# Altium PCB 2.0_LCD_FPC左移1.5mm.PcbDoc
Units mm, origin at the board's own origin, x right, y up, seen from the top; angles counter-clockwise.
Board outline 55.63 x 38 mm, 2 copper layers (Top Layer, Bottom Layer); 15 components, 23 nets, 85 pads, 92 vias.
Unrouted connection lines stored in the file: 19.
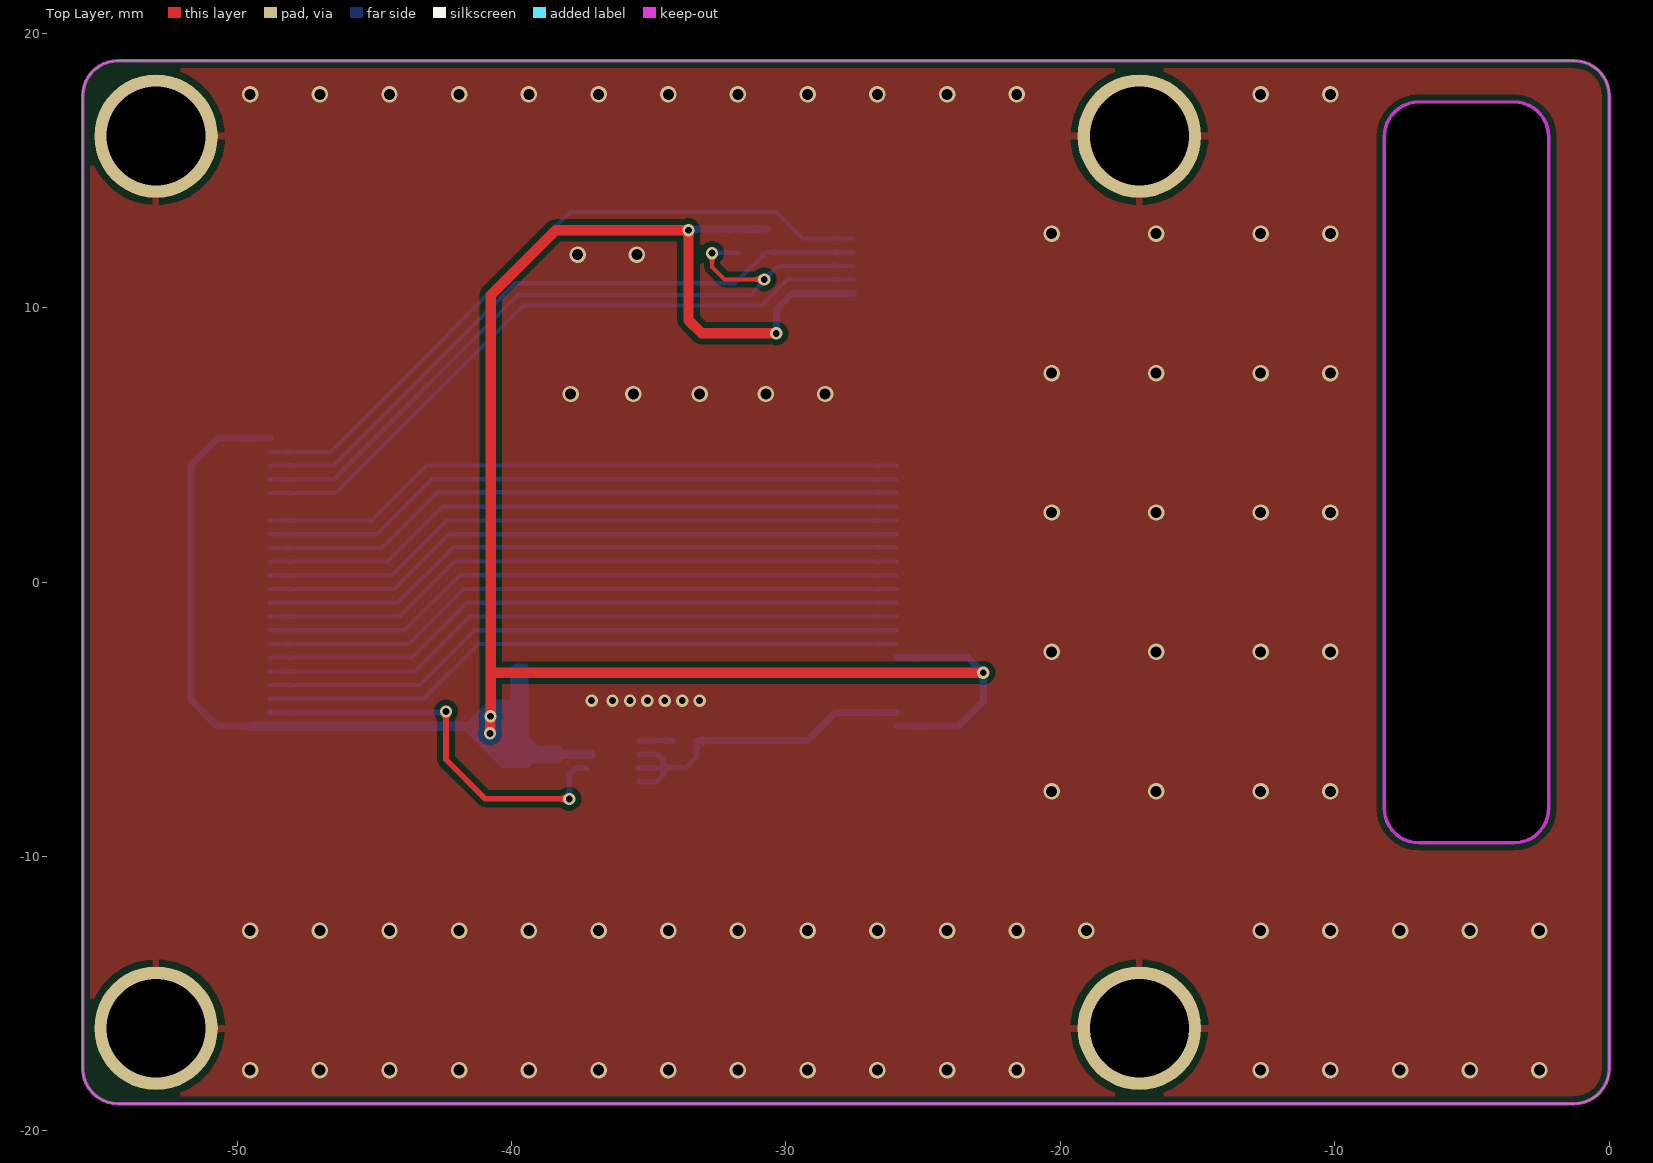
[diagram p0: Top Layer view]
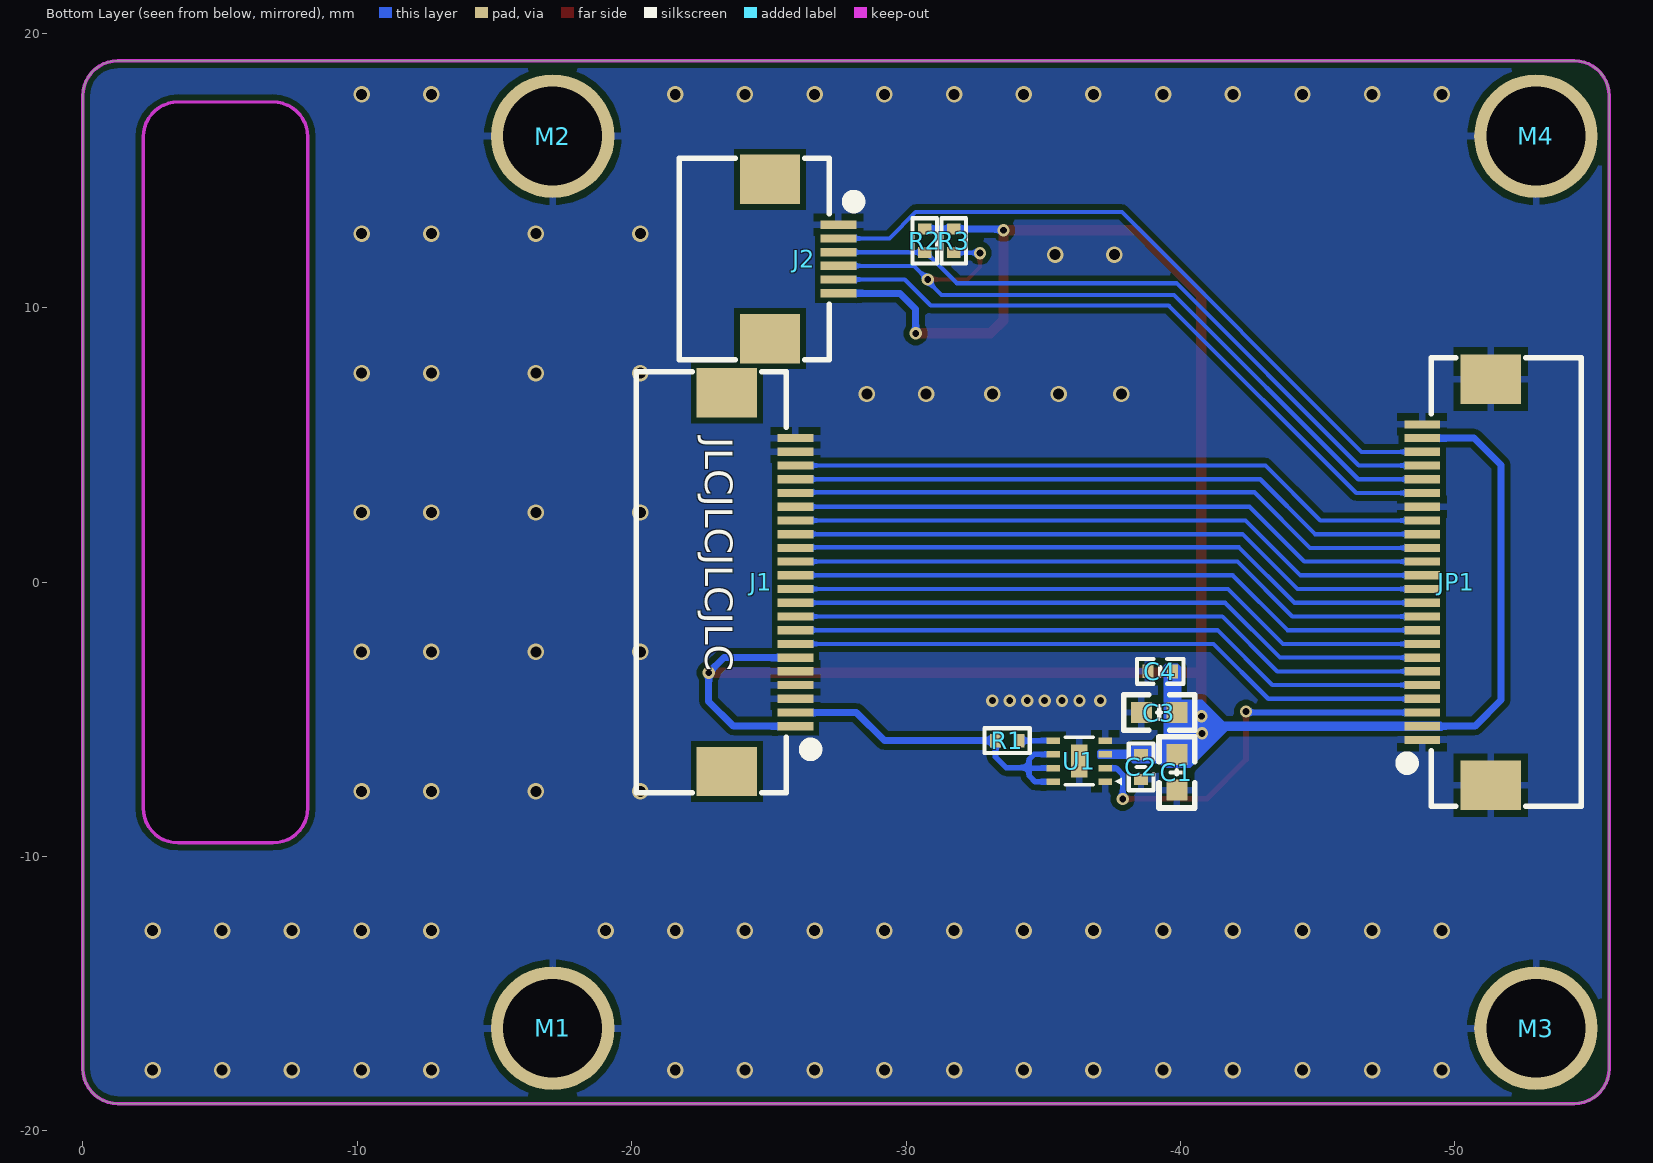
[diagram p1: Bottom Layer view, seen from below]
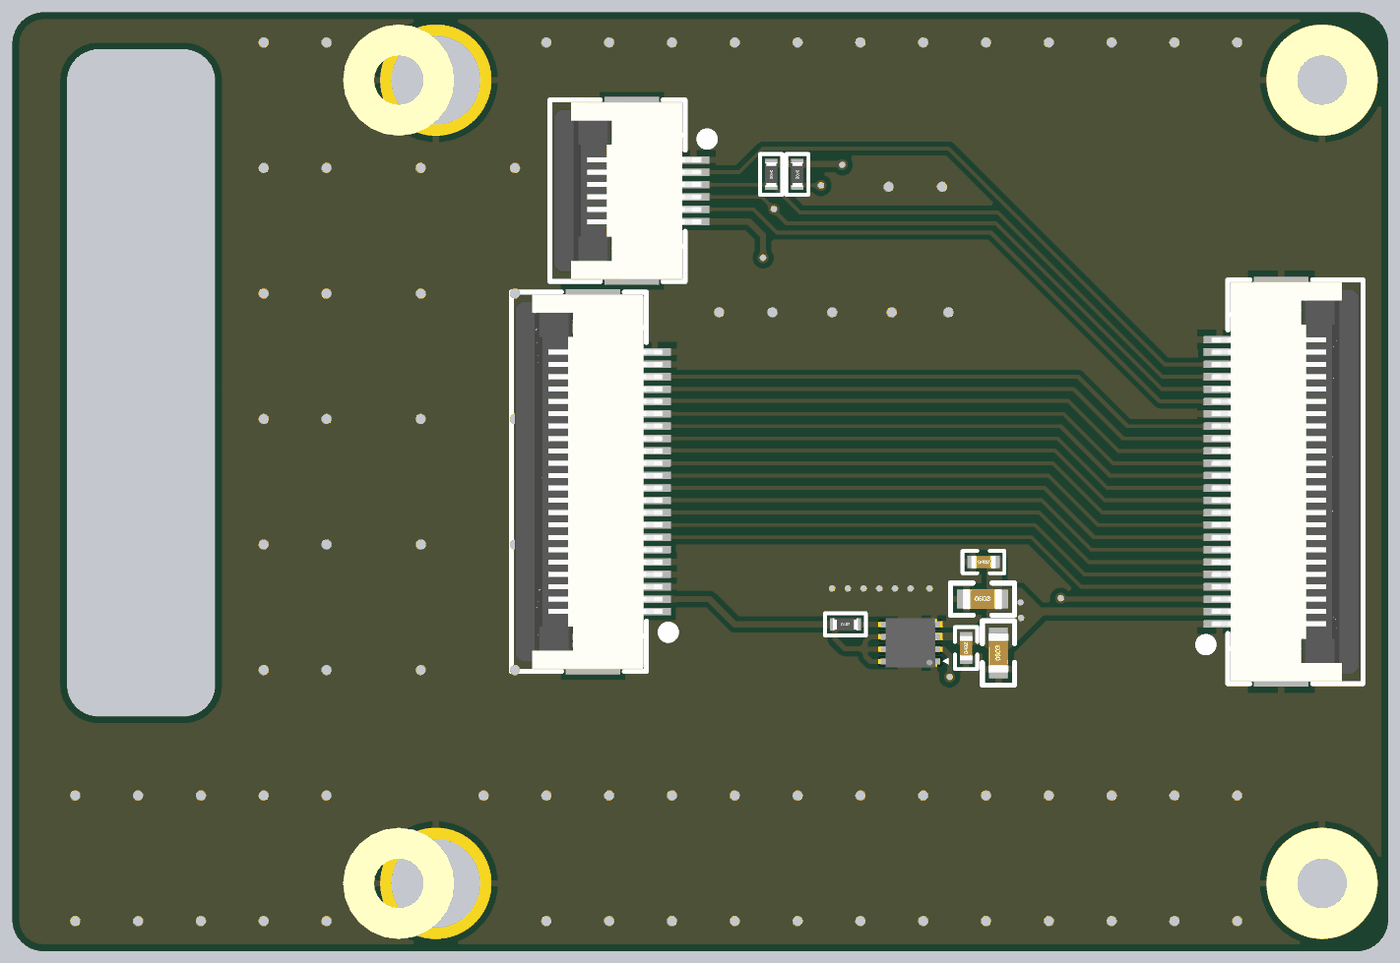
[diagram p2: 3D render of the assembled board from below, using the file's embedded part models]

## Layer stack, top to bottom
Top Solder: solder mask 0.0102, Solder Resist, Dk 3.5
Top Layer: signal copper 0.0356
Dielectric 1: dielectric 0.32, FR-4, Dk 4.8
Bottom Layer: signal copper 0.0356
Bottom Solder: solder mask 0.0102, Solder Resist, Dk 3.5

## Board outline
-55.626,-17.73 -55.626,17.73 cw(c-54.356,17.73) -54.356,19 -1.27,19 cw(c-1.27,17.73) 0,17.73 0,-17.73 cw(c-1.27,-17.73) -1.27,-19 -54.356,-19 cw(c-54.356,-17.73)
cut-out: -8.2,-8.23 ccw(c-6.93,-8.23) -6.93,-9.5 -3.47,-9.5 ccw(c-3.47,-8.23) -2.2,-8.23 -2.2,16.23 ccw(c-3.47,16.23) -3.47,17.5 -6.93,17.5 ccw(c-6.93,16.23) -8.2,16.23

## Design rules (kind name [scope] priority, off if disabled: settings)
Clearance Clearance_1 [InPolygon] p1: gap=0.203 ignorepadtopadclearanceinfootprint=TRUE
Clearance [All] p2: gap=0.152 ignorepadtopadclearanceinfootprint=FALSE
HoleSize [All] p1: absolutevalues=TRUE maxlimit=12.7 minlimit=0.025 maxpercent=80.000 minpercent=20.000
MinimumSolderMaskSliver [All] p1: minsoldermaskwidth=0
PolygonConnect [All] p1: thpad.connectstyle=Relief thpad.reliefconductorwidth=0.254 thpad.reliefentries=4 thpad.polygonreliefangle="90 Angle" thpad.airgapwidth=0.254 smdpad.connectstyle=Relief smdpad.reliefconductorwidth=0.254 smdpad.reliefentries=4 smdpad.polygonreliefangle="90 Angle" smdpad.airgapwidth=0.254 via.connectstyle=Direct via.reliefconductorwidth=0.254 via.reliefentries=4 via.polygonreliefangle="90 Angle" via.airgapwidth=0.254
RoutingVias [All] p1: holewidth=0.25 width=0.45 viastyle="Through Hole" minholewidth=0.25 minwidth=0.45 maxholewidth=0.6 maxwidth=0.8
SilkToSilkClearance [All] p1: silktosilkclearance=0
SilkToSolderMaskClearance [IsPad] p1: minsilkscreentomaskgap=0 clearancetoexposedcopper=TRUE
SolderMaskExpansion [IsVia] p1: expansion=0.102 istentingtop=TRUE useseparateexpansions=TRUE expansionbottom=0.102 istentingbottom=TRUE
Width [All] p1: maxlimit=0.508 minlimit=0.152 preferedwidth=0.152
26 further rules are at their usual default settings.

## Components (designator, comment, footprint, x,y, rotation, side; value= is the part's Value field where it differs from the comment)
C1 "4.7uF" C0603_L -39.869,-6.931 r90 bottom
C2 "0.1uF" C0402_L -38.565,-6.734 r90 bottom
C3 "4.7uF" C0603_L -39.228,-4.75 r180 bottom
C4 "0.1uF" C0402_L -39.268,-3.251 r180 bottom
J1 "0.5mmFPC" FPC0.5-WT-22P -23.473,0 r90 bottom locked
J2 "Touch" FPC0.5-WT-6P -25.041,11.778 r270 bottom locked
JP1 "24Pin" FPC0.5-WT-24P -51.308,0 r90 bottom locked
M1 "M2" M2*4.5*2.5*0.8*3.3#1 -15.621,-16.256 r0 bottom
M2 "M2" M2*4.5*2.5*0.8*3.3#1 -15.621,16.256 r0 bottom locked
M3 "M2" M2*4.5*2.5*0.8*3.3#2 -52.959,-16.256 r0 bottom locked
M4 "M2" M2*4.5*2.5*0.8*3.3#2 -52.959,16.256 r180 bottom
R1 "NC/0R" R0402_L -33.686,-5.774 r180 bottom
R2 "4.7K" R0402_L -30.683,12.439 r270 bottom
R3 "4.7K" R0402_L -31.741,12.439 r270 bottom
U1 "AW9364DNR" DFN2X2-8L -36.312,-6.524 r0 bottom

## Footprints (in the part's own frame and the unit in brackets; to place one, negate y for a bottom-side part, rotate by r counter-clockwise, add the part's x,y. Pads: shape width x height; smd on the part's side, far side on the other; paste and mask are expansions set on the pad)
C0402_L [mm] "无极性贴片电容"
  rect 0.4x0.5 smd: 1(-0.45,0) 2(0.45,0)
  silkscreen extent -0.85,-0.45 0.85,0.45, body extent -0.5,-0.26 0.5,0.26, height 0.54
C0603_L [mil] "无极性贴片电容"
  rect 30x30 smd: 1(-25.59,0) 2(25.59,0)
  silkscreen extent -51,-26 51,26, body extent -31,-16 32,16, height 33
DFN2X2-8L [mm]
  rect 0.5x0.24 smd mask+0.102: 1(-0.95,0.75) 2(-0.95,0.25) 3(-0.95,-0.25) 4(-0.95,-0.75) 5(0.95,-0.75) 6(0.95,-0.25) 7(0.95,0.25) 8(0.95,0.75)
  rect 0.6x1.2 smd mask+0.102: 9(0,0)
  silkscreen extent -1.55,-0.86 0.51,0.88, body extent -1,-1 1,1, height 0.75
FPC0.5-WT-6P [mm] "长：7.2mm，宽：5.2mm，高：2mm               黄晶宝石"
  rect 1.8x2.2 smd: 0(-2.9,0) 0(2.9,0)
  rect 0.3x1.3 smd: 1(-1.25,2.497) 2(-0.75,2.497) 3(-0.25,2.497) 4(0.25,2.497) 5(0.75,2.497) 6(1.25,2.497)
  silkscreen extent -3.67,-3.3 3.67,3.23, body extent -3.6,-3.15 3.6,2.85, height 2
FPC0.5-WT-22P [mm] "长：15.2mm，宽：5.2mm，高：2mm 淘宝ID:黄晶宝石   店铺网址:https://shop463601444.taobao.com"
  rect 1.8x2.2 smd: 0(-6.9,0) 0(6.9,0)
  rect 0.3x1.3 smd: 1(-5.25,-2.497) 2(-4.75,-2.497) 3(-4.25,-2.497) 4(-3.75,-2.497) 5(-3.25,-2.497) 6(-2.75,-2.497) 7(-2.25,-2.497) 8(-1.75,-2.497) 9(-1.25,-2.497) 10(-0.75,-2.497) 11(-0.25,-2.497) 12(0.25,-2.497) 13(0.75,-2.497) 14(1.25,-2.497) 15(1.75,-2.497) 16(2.25,-2.497) 17(2.75,-2.497) 18(3.25,-2.497) 19(3.75,-2.497) 20(4.25,-2.497) 21(4.75,-2.497) 22(5.25,-2.497)
  silkscreen extent -7.68,-3.23 7.68,3.3, body extent -7.6,-2.85 7.6,3.15, height 2
FPC0.5-WT-24P [mm] "长：16.2mm，宽：5.2mm，高：2mm 淘宝ID:黄晶宝石   店铺网址:https://shop463601444.taobao.com"
  rect 1.8x2.2 smd: 0(-7.4,0) 0(7.4,0)
  rect 0.3x1.3 smd: 1(-5.75,2.497) 2(-5.25,2.497) 3(-4.75,2.497) 4(-4.25,2.497) 5(-3.75,2.497) 6(-3.25,2.497) 7(-2.75,2.497) 8(-2.25,2.497) 9(-1.75,2.497) 10(-1.25,2.497) 11(-0.75,2.497) 12(-0.25,2.497) 13(0.25,2.497) 14(0.75,2.497) 15(1.25,2.497) 16(1.75,2.497) 17(2.25,2.497) 18(2.75,2.497) 19(3.25,2.497) 20(3.75,2.497) 21(4.25,2.497) 22(4.75,2.497) 23(5.25,2.497) 24(5.75,2.497)
  silkscreen extent -8.18,-3.3 8.18,3.23, body extent -8.1,-3.15 8.1,2.85, height 2
M2*4.5*2.5*0.8*3.3#1 [mm] "SMT螺母"
  round 4.5 hole 3.6: 1(-1.5,0)
  body extent -2.25,-2.25 2.25,2.25, height 2.5
M2*4.5*2.5*0.8*3.3#2 [mm] "SMT螺母"
  round 4.5 hole 3.6: 1(0,0)
  body extent -2.25,-2.25 2.25,2.25, height 2.5
R0402_L [mm] "1/16W贴片电阻"
  rect 0.4x0.5 smd: 1(-0.425,0) 2(0.425,0)
  silkscreen extent -0.82,-0.45 0.83,0.45, body extent -0.5,-0.25 0.5,0.25, height 0.3

## Part data
C1 C2 C3 C4: library part C, "贴片电容", BOM名称=无极性贴片电容, 联系卖家，免费查找封装=唯一出售店铺网址https://shop463601444.taobao.com
J1: library part 中景园2.0寸屏幕FPC接口
J2: library part 深圳市大显伟业2.0寸触摸屏
JP1: library part 屏幕板FPC, "屏幕板外接座"
M1 M2 M3 M4: library part M2系列, "M2孔支撑柱"
R1 R2 R3: library part R, "贴片电阻", BOM名称=贴片电阻, 联系卖家，免费查找封装=唯一出售店铺网址https://shop463601444.taobao.com
U1: "并联调光背光驱动"

## Via types
v1: diameter 0.6, hole 0.4, Top Layer to Bottom Layer, tented both sides, 76 vias
v2: diameter 0.45, hole 0.25, Top Layer to Bottom Layer, tented both sides, 16 vias

## Nets (pads, with @x,y where several pads share a name; then routed paths per layer and width w, separated by ;. In a path a pad name is that pad's centre, name@x,y a point inside that pad or via, vN(x,y) a via of type N, cw(c..) or ccw(c..) an arc to the next point about the centre after c; other vN are vias at no path point)
CS: J1.18 JP1.15 | length 23.7
  Bottom Layer w0.152: JP1.15 -44.724,1.25 -42.697,3.277 -25.997,3.277 J1.18
DB0: J1.14 JP1.11 | length 23.7
  Bottom Layer w0.152: JP1.11 -44.158,-0.75 -42.138,1.27 -25.99,1.27 J1.14
DB1: J1.13 JP1.10 | length 23.7
  Bottom Layer w0.152: JP1.10 -44.077,-1.25 -42.077,0.75 J1.13
DB2: J1.12 JP1.9 | length 23.7
  Bottom Layer w0.152: JP1.9 -43.907,-1.75 -41.907,0.25 J1.12
DB3: J1.11 JP1.8 | length 23.7
  Bottom Layer w0.152: JP1.8 -43.737,-2.25 -41.737,-0.25 J1.11
DB4: J1.10 JP1.7 | length 23.7
  Bottom Layer w0.152: JP1.7 -43.632,-2.75 -41.632,-0.75 J1.10
DB5: J1.9 JP1.6 | length 23.7
  Bottom Layer w0.152: JP1.6 -43.528,-3.25 -41.528,-1.25 J1.9
DB6: J1.8 JP1.5 | length 23.7
  Bottom Layer w0.152: JP1.5 -43.348,-3.75 -41.348,-1.75 J1.8
DB7: J1.7 JP1.4 | length 23.7
  Bottom Layer w0.152: JP1.4 -43.203,-4.25 -41.203,-2.25 J1.7
GND: C1.1 C2.1 C3.1 C4.1 J1.3 J1.4 J1.5 J1.21 J1.22 J2.1 JP1.0 JP1.1 JP1.18 JP1.24 M1.1 M2.1 M3.1 M4.1 U1.1 U1.4 U1.9
  other v1: -49.53,-17.78 -46.99,-17.78 -44.45,-17.78 -41.91,-17.78 -39.37,-17.78 -36.83,-17.78 -34.29,-17.78 -31.75,-17.78 -29.21,-17.78 -26.67,-17.78 -24.13,-17.78 -21.59,-17.78 -12.7,-17.78 -10.16,-17.78 -7.62,-17.78 -5.08,-17.78 -2.54,-17.78 -49.53,-12.7 -46.99,-12.7 -44.45,-12.7 -41.91,-12.7 -39.37,-12.7 -36.83,-12.7 -34.29,-12.7 -31.75,-12.7 -29.21,-12.7 -26.67,-12.7 -24.13,-12.7 -21.59,-12.7 -19.05,-12.7 -12.7,-12.7 -10.16,-12.7 -7.62,-12.7 -5.08,-12.7 -2.54,-12.7 -20.32,-7.62 -16.51,-7.62 -12.7,-7.62 -10.16,-7.62 -20.32,-2.54 -16.51,-2.54 -12.7,-2.54 -10.16,-2.54 -20.32,2.54 -16.51,2.54 -12.7,2.54 -10.16,2.54 -37.846,6.858 -35.56,6.858 -33.147,6.858 -30.734,6.858 -28.575,6.858 -20.32,7.62 -16.51,7.62 -12.7,7.62 -10.16,7.62 -37.592,11.938 -35.433,11.938 -20.32,12.7 -16.51,12.7 -12.7,12.7 -10.16,12.7 -49.53,17.78 -46.99,17.78 -44.45,17.78 -41.91,17.78 -39.37,17.78 -36.83,17.78 -34.29,17.78 -31.75,17.78 -29.21,17.78 -26.67,17.78 -24.13,17.78 -21.59,17.78 -12.7,17.78 -10.16,17.78
  other v2: -37.084,-4.318 -36.322,-4.318 -35.687,-4.318 -35.052,-4.318 -34.417,-4.318 -33.782,-4.318 -33.147,-4.318
LCD_BL: JP1.3 U1.2 | length 14.9
  Top Layer w0.203: v2(-42.391,-4.713) -42.391,-6.469 -40.961,-7.899 v2(-37.897,-7.899)
  Bottom Layer w0.203: JP1.3 -42.428,-4.75 v2(-42.391,-4.713) ; v2(-37.897,-7.899) -37.897,-7.01 -37.668,-6.782 -37.27,-6.782 U1.2
NetR1_2: R1.2 U1.5 | length 1.3
  Bottom Layer w0.203: U1.5 R1.2@-34.111,-5.774
RD: J1.15 JP1.12 | length 23.7
  Bottom Layer w0.152: JP1.12 -44.264,-0.25 -42.264,1.75 J1.15
RES: J1.20 JP1.17 | length 23.7
  Bottom Layer w0.152: JP1.17 -45.099,2.25 -43.099,4.25 J1.20
RS: J1.17 JP1.14 | length 23.7
  Bottom Layer w0.152: JP1.14 -44.513,0.75 -42.513,2.75 J1.17
TE: J1.19 JP1.16 | length 23.7
  Bottom Layer w0.152: JP1.16 -44.91,1.75 -42.91,3.75 J1.19
Touch_INT: J2.5 JP1.19 | length 24.5
  Bottom Layer w0.152: JP1.19 -46.407,3.25 -39.573,10.084 -30.9,10.084 -29.956,11.028 J2.5
Touch_RST: J2.2 JP1.22 | length 25.3
  Bottom Layer w0.152: JP1.22 -46.605,4.75 -37.867,13.487 -30.353,13.487 -29.394,12.528 J2.2
Touch_SCL: J2.4 JP1.20 R3.2 | length 28.1
  Top Layer w0.152: v2(-32.694,11.994) -32.694,11.488 -32.24,11.034 v2(-30.791,11.034)
  Bottom Layer w0.152: JP1.20 -46.482,3.75 -39.767,10.465 -31.297,10.465 -30.791,10.971 v2(-30.791,11.034) -30.296,11.528 J2.4 ; v2(-32.694,11.994) -32.684,12.004 -31.752,12.004 R3.2
Touch_SDA: J2.3 JP1.21 R2.2 | length 24.5
  Bottom Layer w0.152: JP1.21 -46.499,4.25 -39.853,10.897 -31.851,10.897 -30.733,12.014 R2.2 -30.676,12.021 -27.545,12.021 J2.3
VCC_3V3: C1.2 C2.2 C3.2 C4.2 J1.1 J1.6 J2.6 JP1.2 JP1.23 R2.1 R3.1 U1.3 | length 78.7
  Top Layer w0.381: v2(-40.789,-5.512) -40.778,-5.501 -40.778,-4.894 v2(-40.768,-4.884) -40.768,-3.327 ; v2(-30.353,9.068) -33.071,9.068 -33.553,9.55 v2(-33.553,12.827) -38.398,12.827 -40.768,10.458 -40.768,-3.327 ; v2(-22.809,-3.302) -40.742,-3.302 -40.768,-3.327
  Bottom Layer w0.254: JP1.2 -50.732,-5.25 -51.689,-4.293 -51.689,4.267 -50.706,5.25 JP1.23 ; v2(-33.553,12.827) -33.516,12.864 R3.1 R2.1 ; v2(-30.353,9.068) -30.353,9.957 -29.782,10.528 J2.6 ; J1.1 -23.716,-5.25 -22.809,-4.343 v2(-22.809,-3.302) -23.361,-2.75 J1.6
VLED_K: J1.2 R1.1 U1.6 U1.7 U1.8 | length 13.1
  Bottom Layer w0.203: U1.8 -34.706,-7.274 -34.493,-7.061 -34.493,-6.756 ; U1.7 -34.511,-6.774 -34.493,-6.756 ; U1.6 -34.671,-6.274 -34.493,-6.452 -34.493,-6.756 ; R1.1 -33.261,-6.369 -33.649,-6.756 -34.493,-6.756
  Bottom Layer w0.254: R1.1 -29.211,-5.774 -28.187,-4.75 J1.2
WR: J1.16 JP1.13 | length 23.7
  Bottom Layer w0.152: JP1.13 -44.378,0.25 -42.378,2.25 J1.16
pads on no net: J1.0 J2.0

## Polygon pours and split planes (outlines as drawn)
GND on Bottom Layer "GND_L02_P000" (solid, remove dead copper, pour order 0): -55.626,19.05 -55.626,-19.05 0,-19.05 0,19.05
GND on Top Layer "GND_L01_P001" (solid, remove dead copper, pour order 1): -55.626,19.05 -55.626,-19.05 0,-19.05 0,19.05

## Keep-outs
Keep-Out Layer:
  lines w0.127: -55.626,-17.73 ccw(c-54.356,-17.73) -54.356,-19 -1.27,-19 ccw(c-1.27,-17.73) 0,-17.73 0,17.73 ccw(c-1.27,17.73) -1.27,19 -6.604,19 -54.356,19 ccw(c-54.356,17.73) -55.626,17.73 -55.626,-17.73 ; -8.2,-8.23 ccw(c-6.93,-8.23) -6.93,-9.5 -3.47,-9.5 ccw(c-3.47,-8.23) -2.2,-8.23 -2.2,0 -2.2,16.23 ccw(c-3.47,16.23) -3.47,17.5 -6.93,17.5 ccw(c-6.93,16.23) -8.2,16.23 -8.2,-8.23

## Other copper
Bottom Layer:
  region net VCC_3V3: -38.168,-6.365 -38.104,-6.429 -37.01,-6.429 -36.965,-6.384 -36.965,-6.164 -37.019,-6.111 -38.101,-6.111 -38.097,-6.11 -38.168,-6.181
  region net VCC_3V3: -40.03,-4.318 -40.03,-3.099 -39.903,-2.972 -39.463,-2.972 -39.395,-3.04 -39.395,-4.383 -39.532,-4.519 -39.83,-4.519
  region net VCC_3V3: -49.536,-5.411 -49.581,-5.366 -49.581,-5.367 -49.581,-5.156 -49.515,-5.091 -41.603,-5.091 -40.805,-4.292 -39.489,-4.292 -39.389,-4.392 -39.389,-5.615 -39.038,-5.966 -38.246,-5.966 -38.101,-6.111 -38.101,-6.432 -38.26,-6.591 -39.229,-6.591 -39.396,-6.758 -40.362,-6.758 -41.708,-5.411

## Silkscreen, mask and mechanical layers (free items; w line width, h text height)
Bottom Overlay:
  text "JLCJLCJLCJLC" at -22.682,5.286 h1.02 r90
Mechanical 1:
  circle w0.127: c-17.121,16.256 r2
  circle w0.127: c-17.121,-16.256 r2
  circle w0.127: c-52.959,-16.256 r2
  circle w0.127: c-52.959,16.256 r2
  lines w0.127: -55.626,-17.73 ccw(c-54.356,-17.73) -54.356,-19 -1.27,-19 ccw(c-1.27,-17.73) 0,-17.73 0,17.73 ccw(c-1.27,17.73) -1.27,19 -6.604,19 -54.356,19 ccw(c-54.356,17.73) -55.626,17.73 -55.626,-17.73 ; -8.2,-8.23 ccw(c-6.93,-8.23) -6.93,-9.5 -3.47,-9.5 ccw(c-3.47,-8.23) -2.2,-8.23 -2.2,0 -2.2,16.23 ccw(c-3.47,16.23) -3.47,17.5 -6.93,17.5 ccw(c-6.93,16.23) -8.2,16.23 -8.2,-8.23